# Altium PCB 3s_BMS.PcbDoc
Units mil, origin at the board's own origin, x right, y up, seen from the top; angles counter-clockwise.
Board outline 6770 x 2820 mil, 2 copper layers (Top Layer, Bottom Layer); 80 components, 62 nets, 227 pads, 1 vias.
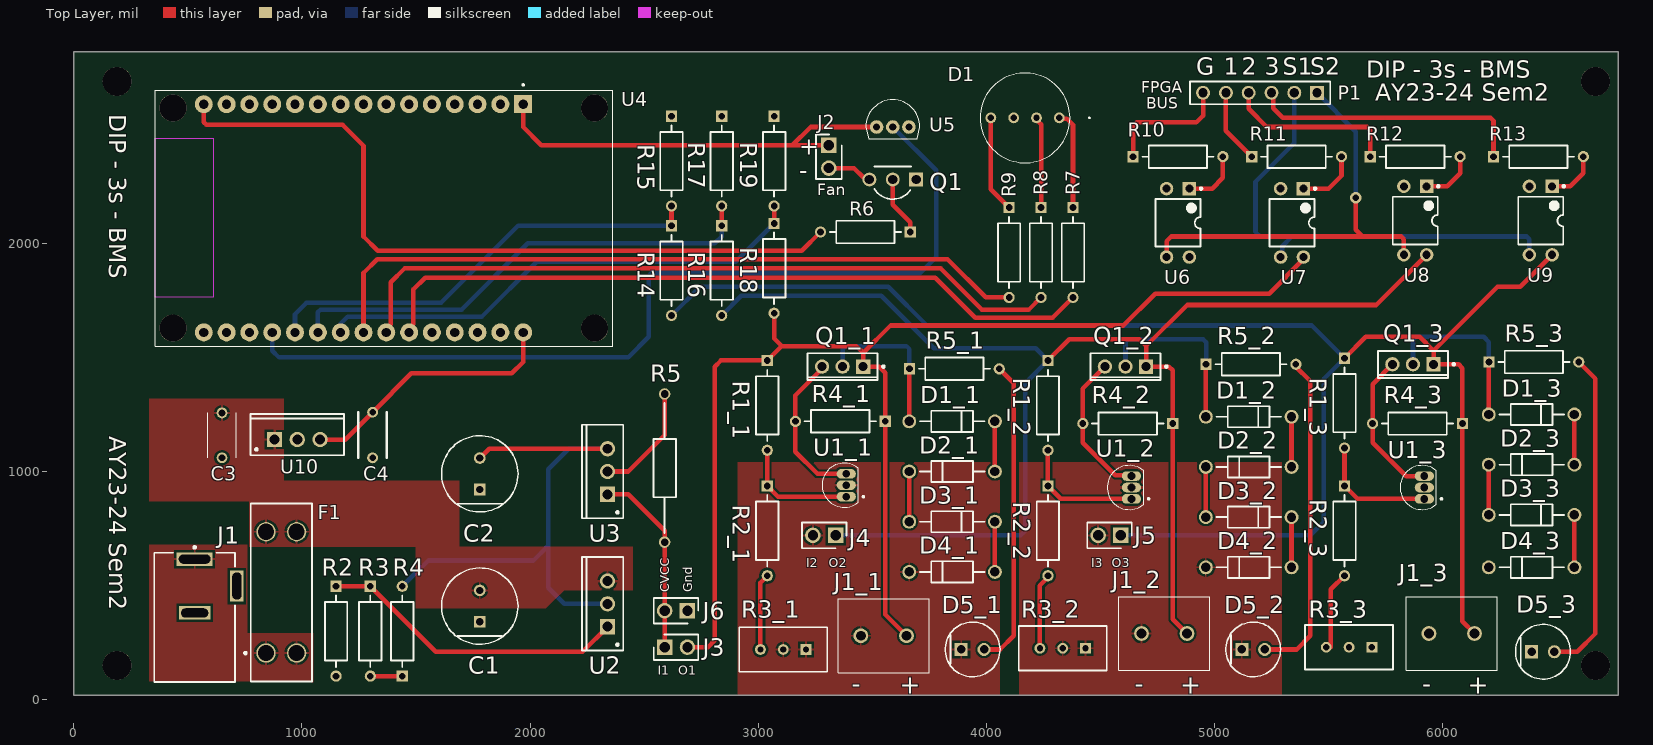
[diagram p0: Top Layer view]
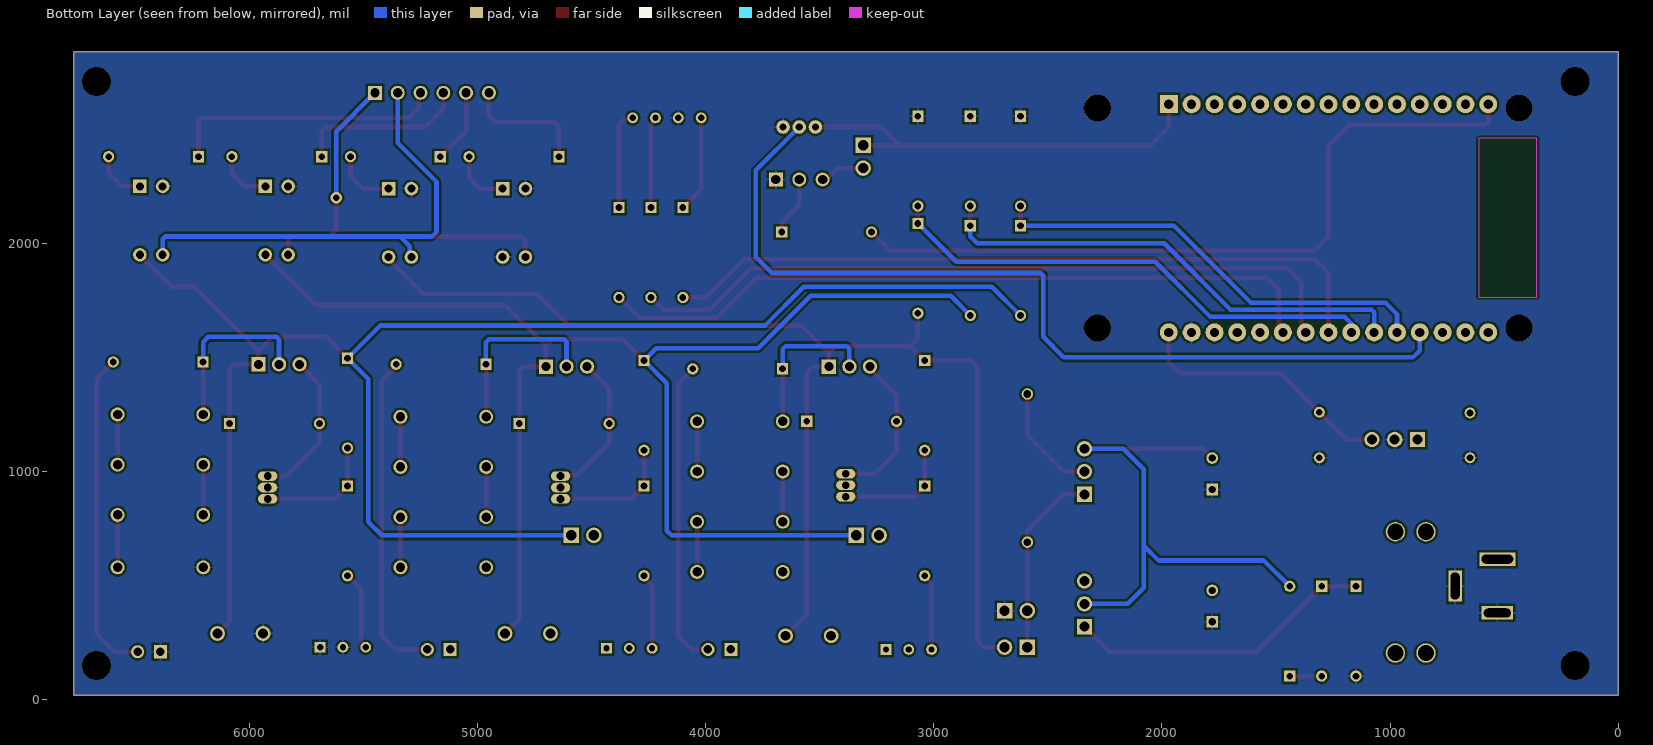
[diagram p1: Bottom Layer view, seen from below]
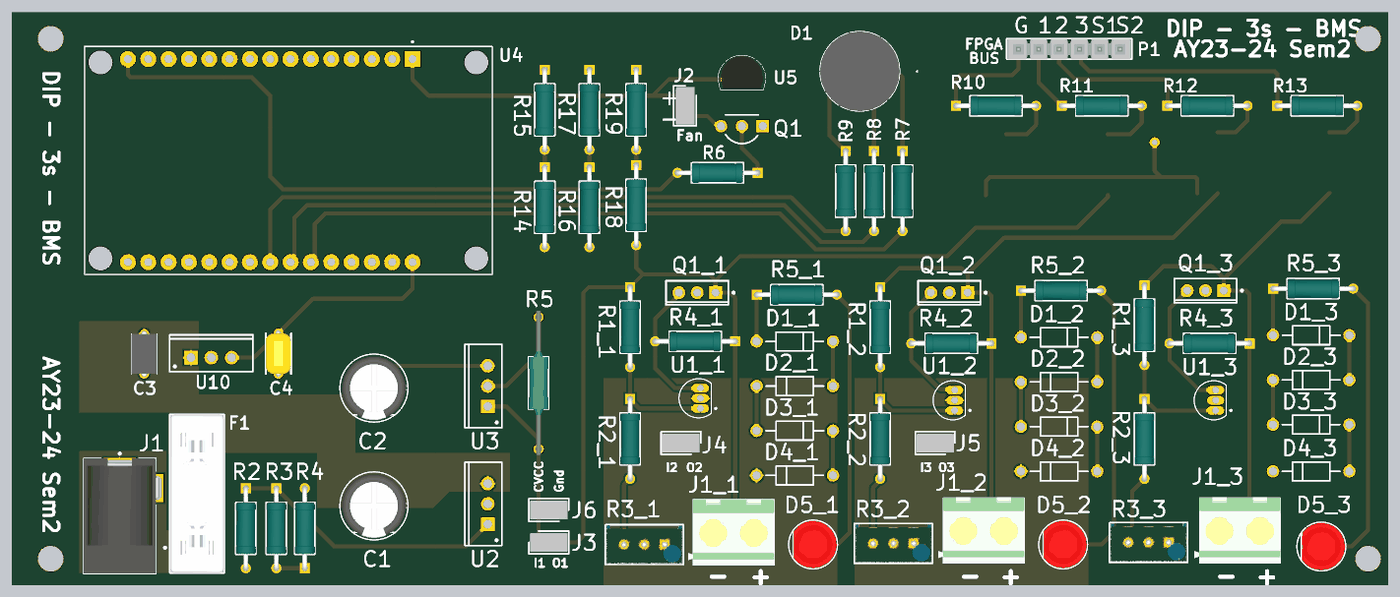
[diagram p2: 3D render of the assembled board from above, using the file's embedded part models]

## Layer stack, top to bottom
Top Solder: solder mask 0.4, Solder Resist, Dk 3.5
Top Layer: signal copper 1.4
Dielectric 1: dielectric 12.6, FR-4, Dk 4.8
Bottom Layer: signal copper 1.4
Bottom Solder: solder mask 0.4, Solder Resist, Dk 3.5

## Board outline
0,20 6770,20 6770,2840 0,2840

## Design rules (kind name [scope] priority, off if disabled: settings)
Clearance Clearance_1 [OnMid vs OnMid] p1: gap=10 ignorepadtopadclearanceinfootprint=FALSE except(0: Arc-Hole Track-Hole SMDPad-Hole THPad-Hole Via-Hole Fill-Hole Poly-Hole Region-Hole Text-Hole; 5: THPad-THPad) sourcerule=37 cellrowname=All cellrowtype=0 cellcolname=All cellcoltype=0 innerlayers=TRUE
Clearance Clearance_2 [(ExistsOnLayer('Top Layer') Or ExistsOnLayer('Bottom Layer')) vs (ExistsOnLayer('Top Layer') Or ExistsOnLayer('Bottom Layer'))] p2: gap=10 ignorepadtopadclearanceinfootprint=FALSE except(0: Arc-Hole Track-Hole SMDPad-Hole THPad-Hole Via-Hole Fill-Hole Poly-Hole Region-Hole Text-Hole; 5: THPad-THPad) sourcerule=37 cellrowname=All cellrowtype=0 cellcolname=All cellcoltype=0 outerlayers=TRUE
Clearance [All] p3: gap=10 ignorepadtopadclearanceinfootprint=FALSE except(0: Arc-Hole Track-Hole SMDPad-Hole THPad-Hole Via-Hole Fill-Hole Poly-Hole Region-Hole Text-Hole) ismatrix=TRUE
HoleSize [All] p1: absolutevalues=TRUE maxlimit=248.03 minlimit=5.91 maxpercent=80.000 minpercent=20.000
MinimumSolderMaskSliver [All] p1: minsoldermaskwidth=1.97
PolygonConnect [All] p1: connectstyle=Relief reliefconductorwidth=10 reliefentries=4 polygonreliefangle="90 Angle" airgapwidth=10
RoutingVias [All] p1: holewidth=28 width=50 viastyle="Through Hole" minholewidth=28 minwidth=50 maxholewidth=28 maxwidth=50
SilkToSilkClearance [All] p1: silktosilkclearance=5
SilkToSolderMaskClearance [IsPad] p1: minsilkscreentomaskgap=5 clearancetoexposedcopper=TRUE
SolderMaskExpansion [All] p1: expansion=4 istentingtop=FALSE
Width MaxMinWidth_1 [All] p1: maxlimit=100 minlimit=10 preferedwidth=10 minimp=50.000000 maximp=50.000000 favimp=50.000000
Width [All] p2: maxlimit=10 minlimit=10 preferedwidth=10
26 further rules are at their usual default settings.

## Classes and differential pairs
channel class "BMS Balancer Indicator": 1 2 3
component class 3: D1_3 D2_3 D3_3 D4_3 D5_3 J1_3 Q1_3 R1_3 R2_3 R3_3 R4_3 R5_3 U1_3
component class 2: D1_2 D2_2 D3_2 D4_2 D5_2 J1_2 Q1_2 R1_2 R2_2 R3_2 R4_2 R5_2 U1_2
component class 1: D1_1 D2_1 D3_1 D4_1 D5_1 J1_1 Q1_1 R1_1 R2_1 R3_1 R4_1 R5_1 U1_1
component class 3s_BMS: C1 C2 C3 C4 D1 F1 J1 J2 J3 J4 J5 J6 P1 Q1 R2 R3 R4 R5 R6 R7 R8 R9 R10 R11 R12 R13 R14 R15 R16 R17 R18 R19 U2 U3 U4 U5 U6 U7 U8 U9 U10

## Components (designator, comment, footprint, x,y, rotation, side; value= is the part's Value field where it differs from the comment)
C1 "100uF" FP-RAD-TH-D_8_0_5-L_11_5-MFG 1780,410 r90 top
C2 "100uF" FP-RAD-TH-D_8_0_5-L_11_5-MFG 1780,990 r90 top
C3 "220nF" K224K20X7RF5TH5 650,1256.85 r270 top
C4 "100nF" C322C104K1R5TA 1310,1160 r270 top
D1 "COM-11120" COM11120 4320,2550 r180 top
D1_1 "1N4007" ONSC-AXIAL_LEAD-2-59-10_P 3850,1220 r180 top (schematic designator D1)
D1_2 "1N4007" ONSC-AXIAL_LEAD-2-59-10_P 5150,1240 r180 top (schematic designator D1)
D1_3 "1N4007" ONSC-AXIAL_LEAD-2-59-10_P 6390,1250 r180 top (schematic designator D1)
D2_1 "1N4007" ONSC-AXIAL_LEAD-2-59-10_P 3850,1000 r0 top (schematic designator D2)
D2_2 "1N4007" ONSC-AXIAL_LEAD-2-59-10_P 5150,1020 r0 top (schematic designator D2)
D2_3 "1N4007" ONSC-AXIAL_LEAD-2-59-10_P 6390,1030 r0 top (schematic designator D2)
D3_1 "1N4007" ONSC-AXIAL_LEAD-2-59-10_P 3850,780 r180 top (schematic designator D3)
D3_2 "1N4007" ONSC-AXIAL_LEAD-2-59-10_P 5150,800 r180 top (schematic designator D3)
D3_3 "1N4007" ONSC-AXIAL_LEAD-2-59-10_P 6390,810 r180 top (schematic designator D3)
D4_1 "1N4007" ONSC-AXIAL_LEAD-2-59-10_P 3850,560 r0 top (schematic designator D4)
D4_2 "1N4007" ONSC-AXIAL_LEAD-2-59-10_P 5150,580 r0 top (schematic designator D4)
D4_3 "1N4007" ONSC-AXIAL_LEAD-2-59-10_P 6390,580 r0 top (schematic designator D4)
D5_1 "Indicator LED" FP-HLMP-4700-MFG 3940,220 r0 top (schematic designator D5)
D5_2 "Indicator LED" FP-HLMP-4700-MFG 5170,220 r0 top (schematic designator D5)
D5_3 "Indicator LED" FP-HLMP-4700-MFG 6440,210 r0 top (schematic designator D5)
F1 "1A" KSTN-3557-2 910,470 r90 top
J1 "Input Jack" CUI-PJ-002A_V 530,498.11 r270 top
J1_1 "1x 18650" 2828372 3650,280 r180 top (schematic designator J1)
J1_2 "1x 18650" 2828372 4880,290 r180 top (schematic designator J1)
J1_3 "1x 18650" 2828372 6140,290 r180 top (schematic designator J1)
J2 "Fan" HDRV2W67P0X254_1X2_467X234X823P 3310,2430 r270 top
J3 "Shunt Conn" HDRV2W67P0X254_1X2_467X234X823P 2590,230 r0 top
J4 "Shunt Conn" HDRV2W67P0X254_1X2_467X234X823P 3340,720 r180 top
J5 "Shunt Conn" HDRV2W67P0X254_1X2_467X234X823P 4590,720 r180 top
J6 "Shunt Conn" HDRV2W67P0X254_1X2_467X234X823P 2690,390 r180 top
P1 "" SMTC-TSW-106-07-X-S 5450,2660 r180 top
Q1 "PN2222" FAIR-TO-92-3 3590,2280 r180 top
Q1_1 "BD140" ONSC-TO-225-3-77-09 3370,1460 r270 top (schematic designator Q1)
Q1_2 "BD140" ONSC-TO-225-3-77-09 4610,1460 r270 top (schematic designator Q1)
Q1_3 "BD140" ONSC-TO-225-3-77-09 5870.16,1470 r270 top (schematic designator Q1)
R1_1 "20KOhm" FP-MRS25-MFG 3040,1290 r270 top (schematic designator R1)
R1_2 "20KOhm" FP-MRS25-MFG 4270,1290 r270 top (schematic designator R1)
R1_3 "20KOhm" FP-MRS25-MFG 5570,1300 r270 top (schematic designator R1)
R2 "3.3K" FP-MRS25-MFG 1150,300 r270 top
R2_1 "20KOhm" FP-MRS25-MFG 3040,740 r270 top (schematic designator R2)
R2_2 "20KOhm" FP-MRS25-MFG 4270,740 r270 top (schematic designator R2)
R2_3 "20KOhm" FP-MRS25-MFG 5570,740 r270 top (schematic designator R2)
R3 "1KOhm" FP-MRS25-MFG 1300,300 r270 top
R3_1 "20K Pot" FP-3296W-MFG 3110,219.8 r90 top (schematic designator R3)
R3_2 "20K Pot" FP-3296W-MFG 4335,225 r90 top (schematic designator R3)
R3_3 "20K Pot" FP-3296W-MFG 5590,229.8 r90 top (schematic designator R3)
R4 "390Ohm" FP-MRS25-MFG 1440,300 r90 top
R4_1 "1KOhm" FP-MRS25-MFG 3360,1220 r180 top (schematic designator R4)
R4_2 "1KOhm" FP-MRS25-MFG 4620,1210 r180 top (schematic designator R4)
R4_3 "1KOhm" FP-MRS25-MFG 5890,1210 r180 top (schematic designator R4)
R5 "2Ohm 1W" RESAD1650W63L650D250 2590,1340 r270 top
R5_1 "330Ohm" FP-MRS25-MFG 3860,1450 r0 top (schematic designator R5)
R5_2 "330Ohm" FP-MRS25-MFG 5160,1470 r0 top (schematic designator R5)
R5_3 "330Ohm" FP-MRS25-MFG 6400,1480 r0 top (schematic designator R5)
R6 "1KOhm" FP-MRS25-MFG 3470,2050 r180 top
R7 "330Ohm" FP-MRS25-MFG 4380,1960 r270 top
R8 "330Ohm" FP-MRS25-MFG 4240,1960 r270 top
R9 "330Ohm" FP-MRS25-MFG 4100,1960 r270 top
R10 "470Ohm" FP-MRS25-MFG 4840,2380 r0 top
R11 "470Ohm" FP-MRS25-MFG 5360,2380 r0 top
R12 "470Ohm" FP-MRS25-MFG 5880,2380 r0 top
R13 "470Ohm" FP-MRS25-MFG 6420,2380 r0 top
R14 "100KOhm" FP-MRS25-MFG 2620,1880.67 r270 top
R15 "1KOhm" FP-MRS25-MFG 2620,2360.67 r270 top
R16 "100KOhm" FP-MRS25-MFG 2840,1880.67 r270 top
R17 "1KOhm" FP-MRS25-MFG 2840,2360.67 r270 top
R18 "100KOhm" FP-MRS25-MFG 3070,1890.67 r270 top
R19 "1KOhm" FP-MRS25-MFG 3070,2360.67 r270 top
U1_1 "TL431IZT" TO92127P490H815-3 3360,940 r90 top (schematic designator U1)
U1_2 "TL431IZT" TO92127P490H815-3 4610,930 r90 top (schematic designator U1)
U1_3 "TL431IZT" TO92127P490H815-3 5893.72,930 r90 top (schematic designator U1)
U2 "LM317T" TO-220 2340,420 r90 top
U3 "LM317T" TO-220 2340,1000 r90 top
U4 "ESP32-DEVKIT-V1" MODULE_ESP32_DEVKIT_V1 1359.17,2110 r270 top
U5 "TMP36GT9Z" TO-92 3590,2510 r270 top
U6 "PS2565-1-A" DIP762W50P254L460H455Q4B 54840,-47910 r270 top
U7 "PS2565-1-A" DIP762W50P254L460H455Q4B 55340,-47910 r270 top
U8 "PS2565-1-A" DIP762W50P254L460H455Q4B 55880,-47900 r270 top
U9 "PS2565-1-A" DIP762W50P254L460H455Q4B 56430,-47900 r270 top
U10 "L7805CV" TO220 980,1140 r0 top

## Footprints (in the part's own frame and the unit in brackets; to place one, negate y for a bottom-side part, rotate by r counter-clockwise, add the part's x,y. Pads: shape width x height; smd on the part's side, far side on the other; paste and mask are expansions set on the pad)
2828372 [mm]
  round 1.65 hole 1.1: 1(0,0) 2(5.08,0)
  silkscreen extent -2.54,-4.1 7.62,4.1, body extent -2.51,-4.11 8.25,4.09, height 9.84
C322C104K1R5TA [mm]
  round 1.21 hole 0.71: 1(-2.54,0) 2(2.54,0)
  silkscreen extent -2.54,-1.59 2.54,1.59, body extent -2.79,-1.6 2.79,1.59, height 6.64
COM11120 [mm]
  round 1.2 hole 0.7: 1(0,0) 2(2.54,0) 3(5.08,0) 4(7.62,0)
  silkscreen extent -3.4,-5 8.81,5, body extent -1.19,-4.99 8.81,4.99, height 13.1
CUI-PJ-002A_V [mm] "THD, 3-Leads, Body 14.4x9mm, Height 11mm"
  rect 1.5x4 hole 1 slot 3.5 at 90 deg: 1(-3,0)
  rect 1.5x3.5 hole 1 slot 3 at 90 deg: 2(3,0)
  rect 3.5x1.5 hole 1 slot 3 at 0 deg: 3(0,4.7)
  silkscreen extent -4.42,-4.5 10.7,4.5, body extent -3.7,-4.5 10.7,4.9, height 11
DIP762W50P254L460H455Q4B [mm] "DIP, 4-Leads, Body 4.60x6.50mm, Pitch 2.54mm"
  rect 1.5x1.5 hole 0.9 mask+0.051: 1(-1273.81,-1268.73)
  round 1.5 hole 0.9 mask+0.051: 2(-1273.81,-1271.27) 3(-1266.19,-1271.27) 4(-1266.19,-1268.73)
  silkscreen extent -1273.93,-1272.5 -1267.35,-1267.3, body extent -1273.94,-1272.3 -1266.06,-1267.7, height 4.3
FAIR-TO-92-3 [mm] "TO, 3-Leads, Body Dia 4.79mm, Pitch 2.6mm"
  rect 1.55x1.55 hole 1.05: 1(-2.6,0)
  round 1.55 hole 1.05: 2(0,0) 3(2.6,0)
  silkscreen extent -2.07,-1.43 2.07,2.19, body extent -2.4,-1.47 2.4,2.2, height 8.49
FP-3296W-MFG [mm]
  rect 1.2x1.2 hole 0.7 paste-2539.97 mask+0: 1(0.005,-2.54)
  round 1.2 hole 0.7 paste-2539.97 mask+0: 2(0.005,0) 3(0.005,2.54)
  silkscreen extent -2.48,-4.89 2.48,4.89, body extent -2.58,-4.99 2.58,4.99, height 0.25
FP-HLMP-4700-MFG [mm]
  rect 1.45x1.45 hole 0.95 paste-2539.97 mask+0: 1(-1.27,0)
  round 1.45 hole 0.95 paste-2539.97 mask+0: 2(1.27,0)
  silkscreen extent -3.05,-3.05 3.05,3.05, body extent -3.15,-3.15 3.15,3.15, height 0.25
FP-MRS25-MFG [mm]
  rect 1.25x1.25 hole 0.75 paste-2539.97 mask+0: 1(-5,0)
  round 1.25 hole 0.75 paste-2539.97 mask+0: 2(5,0)
  silkscreen extent -3.98,-1.25 3.98,1.25, body extent -5.72,-1.35 5.72,1.35, height 0.25
FP-RAD-TH-D_8_0_5-L_11_5-MFG [mm]
  rect 1.3x1.3 hole 0.8 paste-2539.97 mask+0: 1(-1.75,0)
  round 1.3 hole 0.8 paste-2539.97 mask+0: 2(1.75,0)
  silkscreen extent -4.25,-4.25 4.25,4.25, body extent -4.35,-4.35 4.35,4.35, height 0.25
HDRV2W67P0X254_1X2_467X234X823P [mm]
  rect 1.725x1.725 hole 1.15: 1(0,0)
  round 1.725 hole 1.15: 2(2.54,0)
  silkscreen extent -1.21,-1.43 3.75,1.43, body extent -1.07,-1.17 3.61,1.17, height 8.12
K224K20X7RF5TH5 [mm]
  round 1.2 hole 0.75: 1(0,0) 2(5,0)
  silkscreen extent 0,-1.6 5,1.6, body extent -0.28,-1.6 5.28,1.6, height 5.1
KSTN-3557-2 [mm] "Fuse Holder, PCB Mount, Thru-Hole, Body 19.8x6.8mm, Height 7.4mm"
  round 2.15 hole 1.8: 1(-6.75,1.7) 2(-6.75,-1.7) 3(6.75,1.7) 4(6.75,-1.7)
  silkscreen extent -9.9,-3.4 9.9,4.12, body extent -9.91,-3.37 9.91,3.37, height 7.74
MODULE_ESP32_DEVKIT_V1 [mm]
  rect 2x2 / inner round 2 / far side rect 2x2 hole 1.02: 1(-12.7,15.515)
  round 2 hole 1.02: 2(-12.7,12.975) 3(-12.7,10.435) 4(-12.7,7.895) 5(-12.7,5.355) 6(-12.7,2.815) 7(-12.7,0.275) 8(-12.7,-2.265) 9(-12.7,-4.805) 10(-12.7,-7.345) 11(-12.7,-9.885) 12(-12.7,-12.425) 13(-12.7,-14.965) 14(-12.7,-17.505) 15(-12.7,-20.045) 16(12.7,-20.045) 17(12.7,-17.505) 18(12.7,-14.965) 19(12.7,-12.425) 20(12.7,-9.885) 21(12.7,-7.345) 22(12.7,-4.805) 23(12.7,-2.265) 24(12.7,0.275) 25(12.7,2.815) 26(12.7,5.355) 27(12.7,7.895) 28(12.7,10.435) 29(12.7,12.975) 30(12.7,15.515)
  round 3 hole 3 unplated: ""(-12.28,23.475) ""(-12.28,-23.475) ""(12.23,23.475) ""(12.23,-23.475)
  Keep-Out Layer region: 8.78,-25.475 -8.91,-25.475 -8.91,-18.985 8.78,-18.985
  Keep-Out Layer region: 8.78,-25.475 -8.91,-25.475 -8.91,-18.985 8.78,-18.985
  silkscreen extent -14.95,-25.48 14.23,25.48
ONSC-AXIAL_LEAD-2-59-10_P [mm] "AXIAL, 2-Leads, Diameter 2.35mm"
  round 1.55 hole 1.05: 1(-4.77,0) 2(4.77,0)
  silkscreen extent -3.59,-1.17 3.59,1.17
ONSC-TO-225-3-77-09 [mm] "FM, 3-Leads, Body 7.8x3mm, Pitch 2.29mm"
  rect 1.6x1.6 hole 1: 1(0,2.29)
  round 1.6 hole 1: 2(0,0) 3(0,-2.29)
  silkscreen extent -1.49,-3.9 1.51,4.68, body extent -1.49,-3.9 1.51,3.9, height 13.64
RESAD1650W63L650D250 [mm]
  round 1.275 hole 0.85: 1(0,0) 2(16.5,0)
  silkscreen extent 0.99,-1.25 15.51,1.25, body extent -0.75,-1.24 17.25,1.24, height 2.5
SMTC-TSW-106-07-X-S [mm] ".025 SQ Post Terminal Strip Assembly, 1x6 Pins, Vertical, 2.54mm Pitch, Male"
  rect 1.55x1.55 hole 1.02: 1(0,0)
  round 1.55 hole 1.02: 2(2.54,0) 3(5.08,0) 4(7.62,0) 5(10.16,0) 6(12.7,0)
  silkscreen extent -1.46,-1.27 14.16,1.27, body extent -1.27,-1.24 13.97,1.3, height 8.38
TO220 [mm] "TO, Thru-Hole, Vertical, Heatsink Mounted; 3 In-Line Leads; Pitch 2.54 mm"
  rect 1.7x1.7 hole 1.1: 1(-2.54,0)
  round 1.7 hole 1.1: 2(0,0) 3(2.54,0)
  silkscreen extent -5.2,-1.75 5.2,2.85, body extent -5.25,-1.8 5.25,2.9, height 19.7
TO92127P490H815-3 [mm]
  oval 1.07x2.14 hole 0.86: 1(-1.27,-0.667) 2(0,-0.667) 3(1.27,-0.667)
  silkscreen extent -2.45,-2.68 2.45,2.02
TO-92 [mm]
  round 1.51 hole 0.81: 1(0,-1.8) 2(0,0) 3(0,1.8)
  silkscreen extent -3.03,-3 1.3,3, body extent -2.92,-2.6 1.27,2.6, height 11.42
TO-220 [mm] "TO, Thru-Hole, Vertical, Heatsink Mounted; 3 In-Line Leads; Pitch 2.54 mm"
  rect 1.7x1.7 hole 1.1: 1(-2.54,0)
  round 1.7 hole 1.1: 2(0,0) 3(2.54,0)
  silkscreen extent -5.2,-1.75 5.2,2.85, body extent -5.25,-1.8 5.25,2.9, height 19.7

## Part data
C1 C2: library part CMP-05427-001978-1, "Aluminum Electrolytic Capacitors (Radial Lead Type) 100uF ±20% 50V"
C3: library part K224K20X7RF5TH5, "Capacitor", Manufacturer_Name=Vishay, Mouser Part Number=594-K224K20X7RF5TH5, Arrow Part Number=K224K20X7RF5TH5, Arrow Price/Stock=https://www.arrow.com/en/products/k224k20x7rf5th5/vishay, Datasheet Link=http://www.vishay.com/docs/45171/kseries.pdf, Height=5mm, Manufacturer_Part_Number=K224K20X7RF5TH5, Mouser Price/Stock=https://www.mouser.co.uk/ProductDetail/Vishay-BC-Components/K224K20X7RF5TH5?qs=KmQY1egXJHzBG72dl6YDdg%3D%3D
C4: library part C322C104M5U5TA, "Capacitor", Manufacturer_Name=KEMET, Mouser Part Number=80-C322C104M5U, Arrow Part Number=C322C104M5U5TA, Arrow Price/Stock=https://www.arrow.com/en/products/c322c104m5u5ta/kemet-corporation, Datasheet Link=https://content.kemet.com/datasheets/KEM_C1051_GOLDMAX_Z5U.pdf, Height=6.6mm, Manufacturer_Part_Number=C322C104M5U5TA, Mouser Price/Stock=https://www.mouser.co.uk/ProductDetail/KEMET/C322C104M5U5TA?qs=CDCeLP2tGBsLrnt3J6Fqow%3D%3D
D1: "LED", Manufacturer_Name=SparkFun, Mouser Part Number=474-COM-11120, Arrow Part Number=COM-11120, Arrow Price/Stock=https://www.arrow.com/en/products/com-11120/sparkfun-electronics?region=nac, Datasheet Link=http://cdn.sparkfun.com/datasheets/Components/General/YSL-R1047CR4G3BW-F8.pdf, Height=13mm, Manufacturer_Part_Number=COM-11120, Mouser Price/Stock=https://www.mouser.co.uk/ProductDetail/SparkFun/COM-11120?qs=WyAARYrbSnauAm%2FsFIz3Fw%3D%3D
D1_1 D1_2 D1_3 D2_1 D2_2 D2_3 D3_1 D3_2 D3_3 D4_1 D4_2 D4_3: library part CMP-0902-00142-1, "Standard Recovery Rectifier, 2-Pin Axial_Lead, Pb-Free, Bulk Bag", Manufacturer="On Semiconductor", ComponentLink1Description="Manufacturer URL", ComponentLink1URL=http://www.onsemi.com/, ComponentLink2Description=Datasheet, ComponentLink2URL=http://www.onsemi.com/pub_link/Collateral/1N4001-D.PDF, ComponentLink3Description="Package Specification", ComponentLink3URL=http://www.onsemi.cn/pub_link/Collateral/59-10.PDF, DatasheetVersion="Rev. 13", IFSM Max (A)=30, IO(rec) Max (A)=1, Mounting Technology="Through Hole", PackageDescription="2-Pin, Axial Lead, Diameter 2.35 mm", PackageReference=AXIAL_LEAD-2-59-10, PackageVersion="Rev. U, 02/2005", Packing="Bulk Bag", PartNumber=1N4007, RoHS=TRUE, Type="Standard Recovery", VRRM Max (V)=1000
D5_1 D5_2 D5_3: library part CMP-18399-000008-1, "LED RED DIFFUSED T-1 3/4 T/H", Colour=Red, Forward Current=2mA, Forward Voltage=1.7V, Manufacturer=Broadcom, Manufacturer Part Number=HLMP-4700, Power Dissipation=14mW, Reverse Voltage=5V, Temperature="-40°C to +100°C", Temperature Range High=+100°C, Temperature Range Low=-40°C, Automotive=No, Category=Diode, ComponentLink2Description=Datasheet, ComponentLink2URL=https://docs.broadcom.com/docs/AV02-1557EN, Device Class L1=Optoelectronics, Device Class L2=LEDs, Device Class L3=unset, Digikey Description="LED RED DIFFUSED T-1 3/4 T/H", Lead Free=Yes, Led Orientation=Straight, Luminous Intensity=2.3mcd, Mouser Description="LED; Red; 2.3mcd; 0.24In.Dia.; T-1-3/4; 500mA; 1.7V; 635nm; 50deg; 5V; 24mW; -55degC;", Octopart=https://octopart.com/hlmp-4700-broadcom-71130526, Package=HLMP-4700, Peak Emmision Wavelength=635nm, RoHS=TRUE, Viewing Angle=50°, Wavelength=626nm
F1: library part CMP-2000-05461-1, "FUSE HOLDER, PCB MOUNT, 500VAC, 20A, ROHS", Current Rating=30A, Manufacturer=Keystone-Electronics, Voltage=500V, Category=CircuitProtection, Contact Finish=TinNickel, Contact Material=Brass, Datasheet URL=http://datasheet.octopart.com/3557-2-Keystone-datasheet-15715937.pdf, Datasheet Version=Apr-13, Family=Fuseholders, For Use With/Related Products=ATC,ATO257,MINI897, Fuse Size="0.43\"Lx0.15\"Wx0.64\"H(10.92mmx3.81mmx16.25mm)", Fuse Type=Blade, Fuseholder Type=Block, Manufacturer URL=http://www.keyelco.com/, Mounting Type=PCB, Number of Circuits=1, Orientation=Vertical, Series=-, Termination Style=PCPin
J1: library part CMP-2000-06895-2, "Through Hole Right Angle DC Power Jack, 2.5 A, 2 mm Center Pin, 3 Position, -25 to 85 degC, RoHS, Bulk", Current Rating=2.5A, Flammability Rating=UL94V-0, Insulation Resistance=50MOhms, Manufacturer=CUIInc., Operating Temperature Range=-25Cto+85C, Package Description="3-Pin Through Hole Device, Body 14.4 x 9 mm, Height 11 mm", Package Reference=PJ-002A, Voltage Rating=24V, Brand=CUI, Connector Type=DCPowerJack, Contact Gender=Male, Contact Material=Copper, Contact Plating=Nickel, Datasheet URL=http://www.cui.com/product/resource/pj-002a.pdf, Datasheet Version="Rev. 1.03, 04/2016", Factory Pack Quantity=500, Housing Material=PolybutyleneTerephthalate(PBT), Inside Contact Diameter=2mm, Manufacturer URL=http://www.cui.com/, Mounting Angle=Right, Mounting Style=ThroughHole, Mounting Technology=ThroughHole, Outside Contact Diameter=6.5mm, Product=Jacks, Product Category=DCPowerConnectors, RoHS=True, Termination Style=ThroughHole
J1_1 J1_2 J1_3: library part 282837-2, "Connector", Manufacturer_Name="TE Connectivity", Mouser Part Number=571-2828372, Arrow Part Number=282837-2, Arrow Price/Stock=https://www.arrow.com/en/products/282837-2/te-connectivity?region=europe, Datasheet Link=https://www.te.com/commerce/DocumentDelivery/DDEController?Action=srchrtrv&DocNm=282837&DocType=Customer+Drawing&DocLang=English&DocFormat=pdf&PartCntxt=282837-2, Height=10.3mm, Manufacturer_Part_Number=282837-2, Mouser Price/Stock=https://www.mouser.co.uk/ProductDetail/TE-Connectivity/282837-2?qs=A%252Bip%252BNCYi6O2H0NGWOeAxg%3D%3D
J2 J3 J4 J5 J6: library part 5-146277-2, "Connector", Manufacturer_Name="TE Connectivity", Mouser Part Number=571-5-146277-2, Arrow Part Number=5-146277-2, Arrow Price/Stock=https://www.arrow.com/en/products/5-146277-2/te-connectivity?region=nac, Datasheet Link=https://www.te.com/commerce/DocumentDelivery/DDEController?Action=srchrtrv&DocNm=146277&DocType=Customer+Drawing&DocLang=English, Height=8.23mm, Manufacturer_Part_Number=5-146277-2, Mouser Price/Stock=https://www.mouser.co.uk/ProductDetail/TE-Connectivity/5-146277-2?qs=bwpFY26eRVdSYoepUea0uA%3D%3D
P1: library part CMP-1024-00383-1, "0.025\" SQ Post Header, Through-hole, Vertical, -55 to 125 degC, 2.54 mm Pitch, 6-Pin, Male, RoHS", Manufacturer=Samtec, PartNumber=TSW-106-07-G-S, Temperature Range="-55 to 125 degC", ComponentLink1Description="Manufacturer URL", ComponentLink1URL=http://www.samtec.com, ComponentLink2Description=Datasheet, ComponentLink2URL=http://www.samtec.com/documents/webfiles/pdf/TSW_TH.PDF, ComponentLink3Description="Package Specification", ComponentLink3URL=http://www.samtec.com/documents/webfiles/cpdf/TSW-XXX-XX-XXX-X-XX-XXX-MKT.pdf, DatasheetVersion=F-214, Mounting Technology=Through-hole, Orientation=Vertical, PackageDescription=".025[0.64] SQ. Post Terminal Strip Assembly", PackageReference=TSW-106-07-X-S, PackageVersion="DM, 8/1988", Pitch="2.54 mm", RoHS=True
Q1: library part CMP-2000-06911-1, "NPN General-Purpose Amplifier, 40 V, -55 to 150 degC, 3-Pin TO-92, RoHS, Tape and Reel", Collector- Base Voltage VCBO=75V, Collector- Emitter Voltage VCEO Max=40V, Collector-Emitter Saturation Voltage=1V, DC Current Gain hFE Max=300, Emitter- Base Voltage VEBO=6V, Manufacturer=FairchildSemiconductor, Maximum DC Collector Current=1A, Maximum Operating Temperature=+150C, Maximum Power Dissipation=625mW, Minimum Operating Temperature=-55C, Package / Case=TO-92-3KinkedLead, Package Description="3-Pin Transistor Outline Package, Body Dia 4.79 mm, Pitch 2.6 mm", Package Reference=TO-92, <PCN>=http://www.mouser.com/PCN/3.26.10LTBDFairchild.pdf, Brand=FairchildSemiconductor, Configuration=Single, Datasheet URL=https://www.fairchildsemi.com/datasheets/PN/PN2222A.pdf, Datasheet Version="Rev. 1.1.0, 07/2014", DC Collector/Base Gain hfe Min=100, Factory Pack Quantity=2000, Gain Bandwidth Product fT=300MHz, Manufacturer URL=https://www.fairchildsemi.com/, Mounting Style=ThroughHole, Mounting Technology=ThroughHole, Packaging=Reel, Product Category=BipolarTransistors-BJT, RoHS=Details, Series=PN2222, Transistor Polarity=NPN, Unit Weight=0.008466oz
Q1_1 Q1_2 Q1_3: library part CMP-1048-00039-1, "Plastic Medium-Power Silicon PNP Transistor, 3-Pin TO-225, Bulk Box", Manufacturer="On Semiconductor", ComponentLink1Description="Manufacturer URL", ComponentLink1URL=http://www.onsemi.com/, ComponentLink2Description=Datasheet, ComponentLink2URL=http://www.onsemi.com/pub_link/Collateral/BD136-D.PDF, ComponentLink3Description="Package Specification", ComponentLink3URL=http://www.onsemi.com/pub_link/Collateral/77-09.PDF, DatasheetVersion="Rev. 15", IC Continuous (A)=1.5, Mounting Technology="Through Hole", PackageDescription="3-Pin Flange Mount, Vertical Straight Lead, Body 7.6 x 2.7 mm, Pitch 2.29 mm", PackageReference=TO-225-3-77-09, PackageVersion="Rev. AC, 12/2013", Packing="Bulk Box", PartNumber=BD140, Polarity=PNP, RoHS=FALSE
R1_1 R1_2 R1_3 R2 R2_1 R2_2 R2_3 R3 R4 R4_1 R4_2 R4_3 R5_1 R5_2 R5_3 R6 R7 R8 R9 R10 R11 R12 R13 R14 R15 R16 R17 R18 R19: library part CMP-02408-000051-1, "RES 1K OHM 0.6W 1% AXIAL", Case/Package=Axial, Max Operating Temperature=155°C, Max Power Dissipation=600mW, Min Operating Temperature=-55°C, Package Quantity=5000, Resistance=1kR, Resistance Tolerance=1%, Resistor Type="Metal Film", Temperature Coefficient=50ppm/°C, Voltage Rating=350V, Construction=Cylindrical, Contact Plating=Tin, Diameter=2.5mm, Lead Diameter=0.6mm, Lead Free="Lead Free", Length=6.5mm, Military Standard=Not, Mount="Through Hole", Number of Pins=2, Number of Terminations=2, Packaging="Tape and Reel", Power Rating=600mW, Radiation Hardening=No, RoHS Compliant=Yes, Series=MRS25, Technology="THIN FILM", Termination=Axial, Tolerance=1%, Voltage Rating (DC)=350V, Weight=0.00776oz, Width=2.5mm
R3_1 R3_2 R3_3: library part CMP-07234-000046-1, "TRIMMER 500 OHM 0.5W PC PIN TOP", Color=Blue, Max Operating Temperature=125°C, Max Power Dissipation=500mW, Min Operating Temperature=-55°C, Package Quantity=50, Resistance=500R, Resistance Tolerance=10%, Resistor Type=Cermet, Temperature Coefficient=100ppm/°C, Contact Plating=Tin, Depth=4.83mm, Height=0.395inch, Lead Free="Lead Free", Length=9.53mm, Military Standard=Not, Mount="Through Hole", Number of Turns=25, Packaging=Rail/Tube, Power Rating=500mW, Radiation Hardening=No, REACH SVHC="No SVHC", RoHS Compliant=Yes, Series=3296, Taper=Linear, Technology=CERMET, Termination=Pin, Tolerance=10%, Weight=0.03oz, Width=9.53mm
R5: library part PR01000102008JR500, "Resistor", Manufacturer_Name=Vishay, Mouser Part Number=594-5073NW2R000J, Datasheet Link=http://www.vishay.com/docs/28729/pr010203.pdf, Manufacturer_Part_Number=PR01000102008JR500, Mouser Price/Stock=https://www.mouser.co.uk/ProductDetail/Vishay-BC-Components/PR01000102008JR500?qs=LCMWAU1DZcxktvb8nmcPfw%3D%3D
U1_1 U1_2 U1_3: library part CMP-029-000000-1, Package=None, Check_prices=https://www.snapeda.com/parts/TL431IZT/Onsemi/view-part/?ref=eda, Component Type=Standard, Design Item ID=TL431IZT, MF=Onsemi, MP=TL431IZT, Pin Count=3, SnapEDA_Link=https://www.snapeda.com/parts/TL431IZT/Onsemi/view-part/?ref=snap, Source=TL431IZT.SchLib
U2 U3: library part CMP-0244-00444-1, "1.5A, 1.2V to 37V Adjustable Voltage Regulator, 3-Pin TO-220", ComponentLink1Description="Manufacturer URL", ComponentLink1URL=http://www.st.com, ComponentLink2Description=Datasheet, ComponentLink2URL=http://www.st.com/internet/com/TECHNICAL_RESOURCES/TECHNICAL_LITERATURE/DATASHEET/CD00000455.pdf, ComponentLink3Description="Package Specification", ComponentLink3URL=http://www.st.com/internet/com/TECHNICAL_RESOURCES/TECHNICAL_LITERATURE/PACKAGE_INFORMATION/CD00004649.pdf, DatasheetVersion=1/11/2011, PackageDescription="TO, Thru-Hole, Vertical, Heatsink Mounted; 3 In-Line Leads; Pitch 2.54 mm", PackageReference=TO-220, PackageVersion=2011
U4: library part CMP-027-000000-1, "Dual core, Wi-Fi: 2.4 GHz up to 150 Mbits/s,BLE (Bluetooth Low Energy) and legacy Bluetooth, 32 bits, Up to 240 MHz", Package=None, Availability="Not in stock", Check_prices=https://www.snapeda.com/parts/ESP32-DEVKIT-V1/Do+it/view-part/?ref=eda, Component Type=Standard, Design Item ID=ESP32-DEVKIT-V1, MF="Do it", MP=ESP32-DEVKIT-V1, Pin Count=30, Price=None, SnapEDA_Link=https://www.snapeda.com/parts/ESP32-DEVKIT-V1/Do+it/view-part/?ref=snap, Source=ESP32-DEVKIT-V1.SchLib
U5: "Thermistor", Manufacturer_Name="Analog Devices", Mouser Part Number=584-TMP36GT9Z, Arrow Part Number=TMP36GT9Z, Arrow Price/Stock=https://www.arrow.com/en/products/tmp36gt9z/analog-devices?region=nac, Datasheet Link=https://datasheet.datasheetarchive.com/originals/distributors/SFDatasheet-4/sf-00085637.pdf, Manufacturer_Part_Number=TMP36GT9Z, Mouser Price/Stock=https://www.mouser.co.uk/ProductDetail/Analog-Devices/TMP36GT9Z?qs=WIvQP4zGanhT97N47MSoHw%3D%3D
U6 U7 U8 U9: library part CMP-00572-25674254-1, "PS2565-1-A Optocoupler AC-IN 1-CH Transistor DC-OUT 4-Pin PDIP Magazine", Case/Package=DIP, Collector Emitter Saturation Voltage=300mV, Current Transfer Ratio=400%, Forward Current=80mA, Forward Voltage=1.4V, Isolation Voltage=5kV, Max Collector Current=50mA, Max Operating Temperature=100°C, Max Power Dissipation=150mW, Min Operating Temperature=-55°C, Output Voltage=80V, Collector Emitter Voltage (VCEO)=300mV, Lead Free="Lead Free", Max Input Current=80mA, Mount="Through Hole", NexarPartId=25674254, Number of Channels=1, Number of Circuits=1, Number of Elements=1, Number of Pins=4, Output Current per Channel=50mA, Power Dissipation=150mW, Radiation Hardening=No, Rise Time=3µs, RoHS=Compliant
U10: library part CMP-0244-00483-1, "Positive Voltage Regulator, 5V, 3-Pin TO-220", ComponentLink1Description="Manufacturer URL", ComponentLink1URL=http://www.st.com, ComponentLink2Description=Datasheet, ComponentLink2URL=http://www.st.com/internet/com/TECHNICAL_RESOURCES/TECHNICAL_LITERATURE/DATASHEET/CD00000444.pdf, ComponentLink3Description="Package Specification", ComponentLink3URL=http://www.st.com/internet/com/TECHNICAL_RESOURCES/TECHNICAL_LITERATURE/PACKAGE_INFORMATION/CD00004649.pdf, DatasheetVersion=16/11/2011, PackageDescription="TO, Thru-Hole, Vertical, Heatsink Mounted; 3 In-Line Leads; Pitch 2.54 mm", PackageReference=TO220, PackageVersion=ver3.0

## Free pads (board coordinates)
  round 126 hole 126: MH(190,150) MH(190,2710) MH(6670,150) MH(6670,2710)

## Via types
v1: diameter 50, hole 28, Top Layer to Bottom Layer, 1 vias

## Nets (pads, with @x,y where several pads share a name; then routed paths per layer and width w, separated by ;. In a path a pad name is that pad's centre, name@x,y a point inside that pad or via, vN(x,y) a via of type N, cw(c..) or ccw(c..) an arc to the next point about the centre after c; other vN are vias at no path point)
+3.3V: J2.1 U4.1 U5.1 | length 1875.4
  Top Layer w20: U4.1 1970,2510 2050,2430 3150,2430 ; J2.1 3150,2430 ; U5.1 3230,2510 3150,2430
+5V: C4.1 U4.30 U10.3 | length 1160.8
  Top Layer w20: U10.3 1190,1140 C4.1 1480,1430 1920,1430 1970,1480 U4.30
+24V: F1.1 F1.2 J1.1
CC_Adj: J3.1 J6.2 R5.2 U3.1 | length 826.3
  Top Layer w20: U3.1 2430,900 2590,740 R5.2 J6.2 J3.1
Cell_1_Monitor: J1_1.1 J3.2 Q1_1.1 R1_1.1 R4_1.1 R18.2 U7.4 | length 5652.9
  Top Layer w20: J3.2 2780,230 2810,260 2810,1460 2836.85,1486.85 R1_1.1 3103.15,1550 ; R18.2 3070,1583.15 3103.15,1550 ; J1_1.1@3635.39,294.61 3556.85,373.15 R4_1.1 3556.85,1433.15 3530,1460 Q1_1.1 3460.16,1519.84 ; U7.4 5390,1930 5240,1780 4740,1780 4600,1640 3580.32,1640 3460.16,1519.84 ; 3103.15,1550 3430,1550 3460.16,1519.84
  Bottom Layer w20: R1_1.1@3033.15,1480 R1_1.1 ; R18.2@3070,1683.82 R18.2@3073.43,1680.39
Cell_2_Monitor: J1_2.1 J4.1 Q1_2.1 R1_2.1 R4_2.1 R16.2 U8.4 | length 6465
  Top Layer w20: R1_2.1 4363.15,1580 4670.31,1580 4700.16,1550.16 ; J1_2.1@4867.44,302.56 4816.85,353.15 R4_2.1 4816.85,1443.15 4800,1460 Q1_2.1 4700.16,1550.16 ; J1_2.1@4877.52,287.52 J1_2.1 ; U8.4 5710,1730 4880,1730 4700.16,1550.16
  Bottom Layer w20: R16.2 2926.18,1770 3540,1770 3770,1540 4216.85,1540 R1_2.1 4170,1386.85 4170,740 4150,720 J4.1
Cell_3_Monitor: J1_3.1 J5.1 Q1_3.1 R1_3.1 R4_3.1 R14.2 U9.4 | length 7341.1
  Top Layer w20: R1_3.1 5663.15,1590 5900,1590 5960.31,1529.69 ; J1_3.1 6086.85,343.15 R4_3.1 6086.85,1453.15 6070,1470 Q1_3.1 5960.31,1529.69 ; U9.4 6340,1810 6240.63,1810 5960.31,1529.69
  Bottom Layer w20: R14.2 2746.18,1810 3570,1810 3740,1640 5426.85,1640 R1_3.1 5480,1406.85 5480,780 5420,720 J5.1 J5.1@4600,710
CV_4.2V: C2.2 R4.2 U2.2 U3.3 | length 2400.2
  Top Layer w20: C2.2 1821.1,1100 U3.3
  Top Layer w32: C2.2@1778.9,1060 C2.2
  Bottom Layer w20: R4.2 1553.15,610 2015,610 2080,675 ; C2.2@1778.9,1060 C2.2 ; U2.2 2150,420 2080,490 2080,675 ; U3.3 2170,1100 2080,1010 2080,675
CV_Adj: R2.1 R3.1 U2.1 | length 1354.4
  Top Layer w20: R2.1 R3.1 1586.85,210 2230,210 U2.1
GND: C1.1 C2.1 C3.2 C4.2 D1.3 D4_3.1 D5_3.1 J1.2 J1.3 J1_3.2 J6.1 Q1.1 R2.2 R3_3.1 R3_3.2 R15.1 R17.1 R19.1 U1_3.2 U4.2 U4.29 U5.3 U6.2 U6.4 U7.2 U8.2 U9.2 U10.2
NetD1_1: D1.1 R7.1 | length 435.6
  Top Layer w20: D1.1 4322.92,2547.08 4352.92,2547.08 4380,2520 R7.1
NetD1_1_1: D1_1.1 D2_1.2 | length 220
  Top Layer w20: D2_1.2 D1_1.1
NetD1_2: D1.2 R8.1 | length 401.4
  Top Layer w20: D1.2 4220,2542.63 4240,2522.63 R8.1
NetD1_2_1: D1_2.1 D2_2.2 | length 220
  Top Layer w20: D2_2.2 D1_2.1
NetD1_3_1: D1_3.1 D2_3.2 | length 220
  Top Layer w20: D2_3.2 D1_3.1
NetD1_4: D1.4 R9.1 | length 426.3
  Top Layer w20: D1.4 4020,2236.85 R9.1
NetD2_1_1: D2_1.1 D3_1.2 | length 220
  Top Layer w20: D3_1.2 D2_1.1
NetD2_2_1: D2_2.1 D3_2.2 | length 220
  Top Layer w20: D3_2.2 D2_2.1
NetD2_3_1: D2_3.1 D3_3.2 | length 220
  Top Layer w20: D3_3.2 D2_3.1
NetD3_1_1: D3_1.1 D4_1.2 | length 220
  Top Layer w20: D4_1.2 D3_1.1
NetD3_2_1: D3_2.1 D4_2.2 | length 220
  Top Layer w20: D4_2.2 D3_2.1
NetD3_3_1: D3_3.1 D4_3.2 | length 230
  Top Layer w20: D4_3.2 D3_3.1
NetD4_1_1: D4_1.1 D5_1.1 J1_1.2 J4.2 R3_1.1 R3_1.2 U1_1.2
NetD4_2_1: D4_2.1 D5_2.1 J1_2.2 J5.2 R3_2.1 R3_2.2 U1_2.2
NetD5_1_2: D5_1.2 R5_1.2 | length 1351
  Top Layer w20: D5_1.2 4060,220 4120,280 4120,1386.85 R5_1.2
NetD5_2_2: D5_2.2 R5_2.2 | length 1431
  Top Layer w20: D5_2.2 5360,220 5420,280 5420,1396.85 R5_2.2@5356.85,1460
NetD5_3_2: D5_3.2 R5_3.2 | length 1433.4
  Top Layer w20: D5_3.2 6590,210 6670,290 6670,1406.85 R5_3.2
NetJ2_2: J2.2 Q1.3 | length 198.3
  Top Layer w20: J2.2 3420,2330 3462.15,2287.85 3479.79,2287.85 Q1.3
NetP1_1: P1.1 U6.3 U8.3 | length 1904.3
  Top Layer w20: U6.3 4790,2010 4810,2030 5650,2030 ; v1(5620,2200) 5620,2060 5650,2030 ; U8.3 5830,2018.28 5818.28,2030 5650,2030
  Bottom Layer w20: P1.1 5620,2490 v1(5620,2200)
NetP1_2: P1.2 U7.3 U9.3 | length 2072.5
  Bottom Layer w20: U7.3 5297.47,1947.47 5297.47,1987.47 5340,2030 ; P1.2 5350,2440 5180,2270 5180,2050 5200,2030 5340,2030 ; U9.3 6380,2018.28 6368.28,2030 5340,2030
NetP1_3: P1.3 R13.1 | length 1216.2
  Top Layer w20: P1.3 5257.85,2652.15 5257.85,2592.15 5300,2550 6210,2550 6223.15,2536.85 R13.1
NetP1_4: P1.4 R12.1 | length 758.6
  Top Layer w20: P1.4 5150,2590 5230,2510 5670,2510 5683.15,2496.85 R12.1
NetP1_5: P1.5 R11.1 | length 326.9
  Top Layer w20: P1.5 5050,2493.15 R11.1
NetP1_6: P1.6 R10.1 | length 559.4
  Top Layer w20: R10.1 4643.15,2513.15 4660,2530 4920,2530 4950,2560 P1.6
NetQ1_1_3: Q1_1.3 R4_1.2 U1_1.3 | length 684.7
  Top Layer w20: Q1_1.3 3279.84,1450 3163.15,1333.31 R4_1.2 3163.15,1086.85 3260,990 U1_1.3
NetQ1_2: Q1.2 R6.1 | length 261.8
  Top Layer w20: Q1.2 3590,2170 3666.85,2093.15 R6.1
NetQ1_2_3: Q1_2.3 R4_2.2 U1_2.3 | length 648.2
  Top Layer w20: Q1_2.3 4421.89,1362.05 4421.89,1211.26 R4_2.2 4423.15,1126.85 4565.77,984.23 4632.05,984.23 U1_2.3
NetQ1_3_3: Q1_3.3 R4_3.2 U1_3.3 | length 666.8
  Top Layer w20: Q1_3.3 5693.15,1383.15 R4_3.2 5693.15,1126.85 5840,980 U1_3.3
NetR2_1_2: R2_1.2 R3_1.3 | length 335.6
  Top Layer w20: R3_1.3 3010,513.15 R2_1.2
NetR2_2_2: R2_2.2 R3_2.3 | length 332.5
  Top Layer w20: R3_2.3 4235,500.24 4270,535.24 R2_2.2
NetR2_3_2: R2_3.2 R3_3.3 | length 341.2
  Top Layer w20: R3_3.3@5510,230 5510,483.15 R2_3.2 R2_3.2@5570,540
NetR3_2: R3.2 R4.1 | length 140
  Top Layer w20: R3.2 R4.1
NetR5_1: R5.1 U3.2 | length 496.3
  Top Layer w20: U3.2 2430,1000 2590,1160 R5.1
NetR6_2: R6.2 U4.15 | length 3282.1
  Top Layer w20: U4.15 570,2531.72 581.72,2520 1178.28,2520 1270,2428.28 1270,2030 1331.81,1968.19 3191.34,1968.19 R6.2
NetR7_2: R7.2 U4.25 | length 3219.2
  Top Layer w20: U4.25 1470,1625.89 1489.05,1644.95 1489.05,1799.05 1540,1850 3775.84,1850 3952.29,1673.55 4290.4,1673.55 R7.2
NetR8_2: R8.2 U4.24 | length 3199.7
  Top Layer w20: U4.24 1370,1625.89 1389.05,1644.95 1389.05,1829.05 1450,1890 3800,1890 3980,1710 4186.85,1710 R8.2
NetR9_2: R9.2 U4.23 | length 3184
  Top Layer w20: U4.23 1270,1870 1330,1930 3830,1930 3996.85,1763.15 R9.2
NetR10_2: R10.2 U6.1 | length 259.4
  Top Layer w20: U6.1 4990,2240 5036.85,2286.85 R10.2
NetR11_2: R11.2 U7.1 | length 273.5
  Top Layer w20: U7.1 5500,2240 5556.85,2296.85 R11.2
NetR12_2: R12.2 U8.1 | length 243.5
  Top Layer w20: U8.1 6020,2250 6076.85,2306.85 R12.2
NetR13_2: R13.2 U9.1 | length 233.5
  Top Layer w20: U9.1 6560,2250 6616.85,2306.85 R13.2
NetR14_1: R14.1 R15.2 U4.20 | length 1976.8
  Top Layer w20: R14.1 R15.2
  Bottom Layer w20: U4.20 970,1690 1020,1740 1610,1740 1947.52,2077.52 R14.1
NetR16_1: R16.1 R17.2 U4.21 | length 2129.5
  Top Layer w20: R16.1 R17.2
  Bottom Layer w20: U4.21 1070,1698.28 1081.72,1710 1700,1710 1990,2000 2810,2000 2840,2030 R16.1
NetR18_1: R18.1 R19.2 U4.22 | length 2196.6
  Top Layer w20: R18.1 R19.2
  Bottom Layer w20: U4.22 1171.54,1611.54 1171.54,1650 1200.78,1679.24 1789.24,1679.24 2030,1920 2902.48,1920 R18.1
Temp_Out: U4.19 U5.2 | length 3990.5
  Bottom Layer w20: U4.19 870,1530 900,1500 2430,1500 2520,1590 2520,1858.28 2531.72,1870 3710,1870 3780,1940 3780,2320 U5.2
Vin: C1.2 C3.1 F1.3 F1.4 U2.3 U10.1
Vout_1: D1_1.2 Q1_1.2 R5_1.1 | length 699
  Top Layer w20: D1_1.2 3662.68,1220.47 3662.68,1449.53 R5_1.1
  Bottom Layer w20: Q1_1.2 3370,1538.28 3381.72,1550 3650,1550 3663.15,1536.85 R5_1.1
Vout_2: D1_2.2 Q1_2.2 R5_2.1 | length 799
  Top Layer w20: D1_2.2 4962.68,1240.47 4962.68,1469.53 R5_2.1
  Bottom Layer w20: Q1_2.2 4610,1568.28 4621.72,1580 4950,1580 4963.15,1566.85 R5_2.1
Vout_3: D1_3.2 Q1_3.2 R5_3.1 | length 785.8
  Top Layer w20: R5_3.1@6193.15,1480 R5_3.1@6197.68,1475.47 ; D1_3.2@6197.68,1254.53 D1_3.2 6202.68,1250.47 6202.68,1479.53 R5_3.1
  Bottom Layer w20: Q1_3.2 5870.16,1578.28 5881.87,1590 6180,1590 6203.15,1566.85 R5_3.1
Zener_Ref_1: R1_1.2 R2_1.1 U1_1.1 | length 522
  Top Layer w20: R1_1.2 R2_1.1 3086.85,890 U1_1.1
Zener_Ref_2: R1_2.2 R2_2.1 U1_2.1 | length 546.1
  Top Layer w20: R1_2.2 R2_2.1 4326.85,880 U1_2.1
Zener_Ref_3: R1_3.2 R2_3.1 U1_3.1 | length 539.8
  Top Layer w20: R1_3.2 R2_3.1 5626.85,880 U1_3.1
pads on no net: U4. U4.3 U4.4 U4.5 U4.6 U4.7 U4.8 U4.9 U4.10 U4.11 U4.12 U4.13 U4.14 U4.16 U4.17 U4.18 U4.26 U4.27 U4.28

## Polygon pours and split planes (outlines as drawn)
GND on Bottom Layer "GND_L02_P012" (solid, pour order 12): 0,2840 6770,2840 6770,20 0,20
NetD4_2_1 on Top Layer "NETD4_2_1_L01_P021" (solid, pour order 21): 5295,1040 5295,20 4145,20 4145,1040 4205,1040
NetD4_1_1 on Top Layer "NETD4_1_1_L01_P020" (solid, pour order 20): 4060,1040 4060,20 2910,20 2910,1040 2970,1040
Vin on Top Layer "VIN_L01_P019" (solid, pour order 19): 1500,670 1500,400 2070,400 2150,480 2450,480 2450,670 2440,670
Vin on Top Layer "VIN_L01_P016" (solid, pour order 16): 1690,670 1040,670 770,670 770,870 330,870 330,1320 920,1320 920,960 1690,960
+24V on Top Layer "+24V_L01_P015" (solid, pour order 15): 330,680 760,680 760,290 1050,290 1050,70 1040,80 330,80

## Silkscreen, mask and mechanical layers (free items; w line width, h text height)
Top Overlay:
  text "G" at 4920,2740 h75
  text "1" at 5040,2740 h75
  text "2" at 5120,2740 h75
  text "3" at 5220,2740 h75
  text "S1" at 5300,2740 h75
  text "S2" at 5420,2740 h75
  text "DIP - 3s - BMS" at 5665,2725 h75
  text "FPGA" at 4680,2660 h50
  text "AY23-24 Sem2" at 5705,2625 h75
  text "BUS" at 4700,2590 h50
  text "DIP - 3s - BMS" at 155,2565 h75 r270
  text "+" at 3180,2387.5 h75
  text "-" at 3180,2282.51 h75
  text "Fan" at 3260,2210 h50
  text "AY23-24 Sem2" at 155,1155 h75 r270
  text "I2" at 3210,580 h40
  text "O2" at 3310,580 h40
  text "I3" at 4460,580 h40
  text "O3" at 4550,580 h40
  text "CVCC" at 2610,470 h40 r90
  text "Gnd" at 2710,470 h40 r90
  text "I1" at 2560,110 h40
  text "O1" at 2650,110 h40
  text "-" at 3410,30.01 h80
  text "-" at 4650,30.01 h80
  text "-" at 5910,30.01 h80
  text "+" at 3620,26.67 h80
  text "+" at 4850,26.67 h80
  text "+" at 6110,26.67 h80

## Text inside footprints (layer, text, board x,y; h text height)
U6: Top Assembly "IC?" at 4843.94,2086.06 h19.68 r270
U7: Top Assembly "IC?" at 5343.94,2086.06 h19.68 r270
U8: Top Assembly "IC?" at 5883.94,2096.06 h19.68 r270
U9: Top Assembly "IC?" at 6433.94,2096.06 h19.68 r270